# Altium PCB MOTOR_DRIVER.PcbDoc
Units mil, origin at the board's own origin, x right, y up, seen from the top; angles counter-clockwise.
Board outline 1860 x 1620 mil, 2 copper layers (Top Layer, Bottom Layer); 22 components, 16 nets, 59 pads, 0 vias.
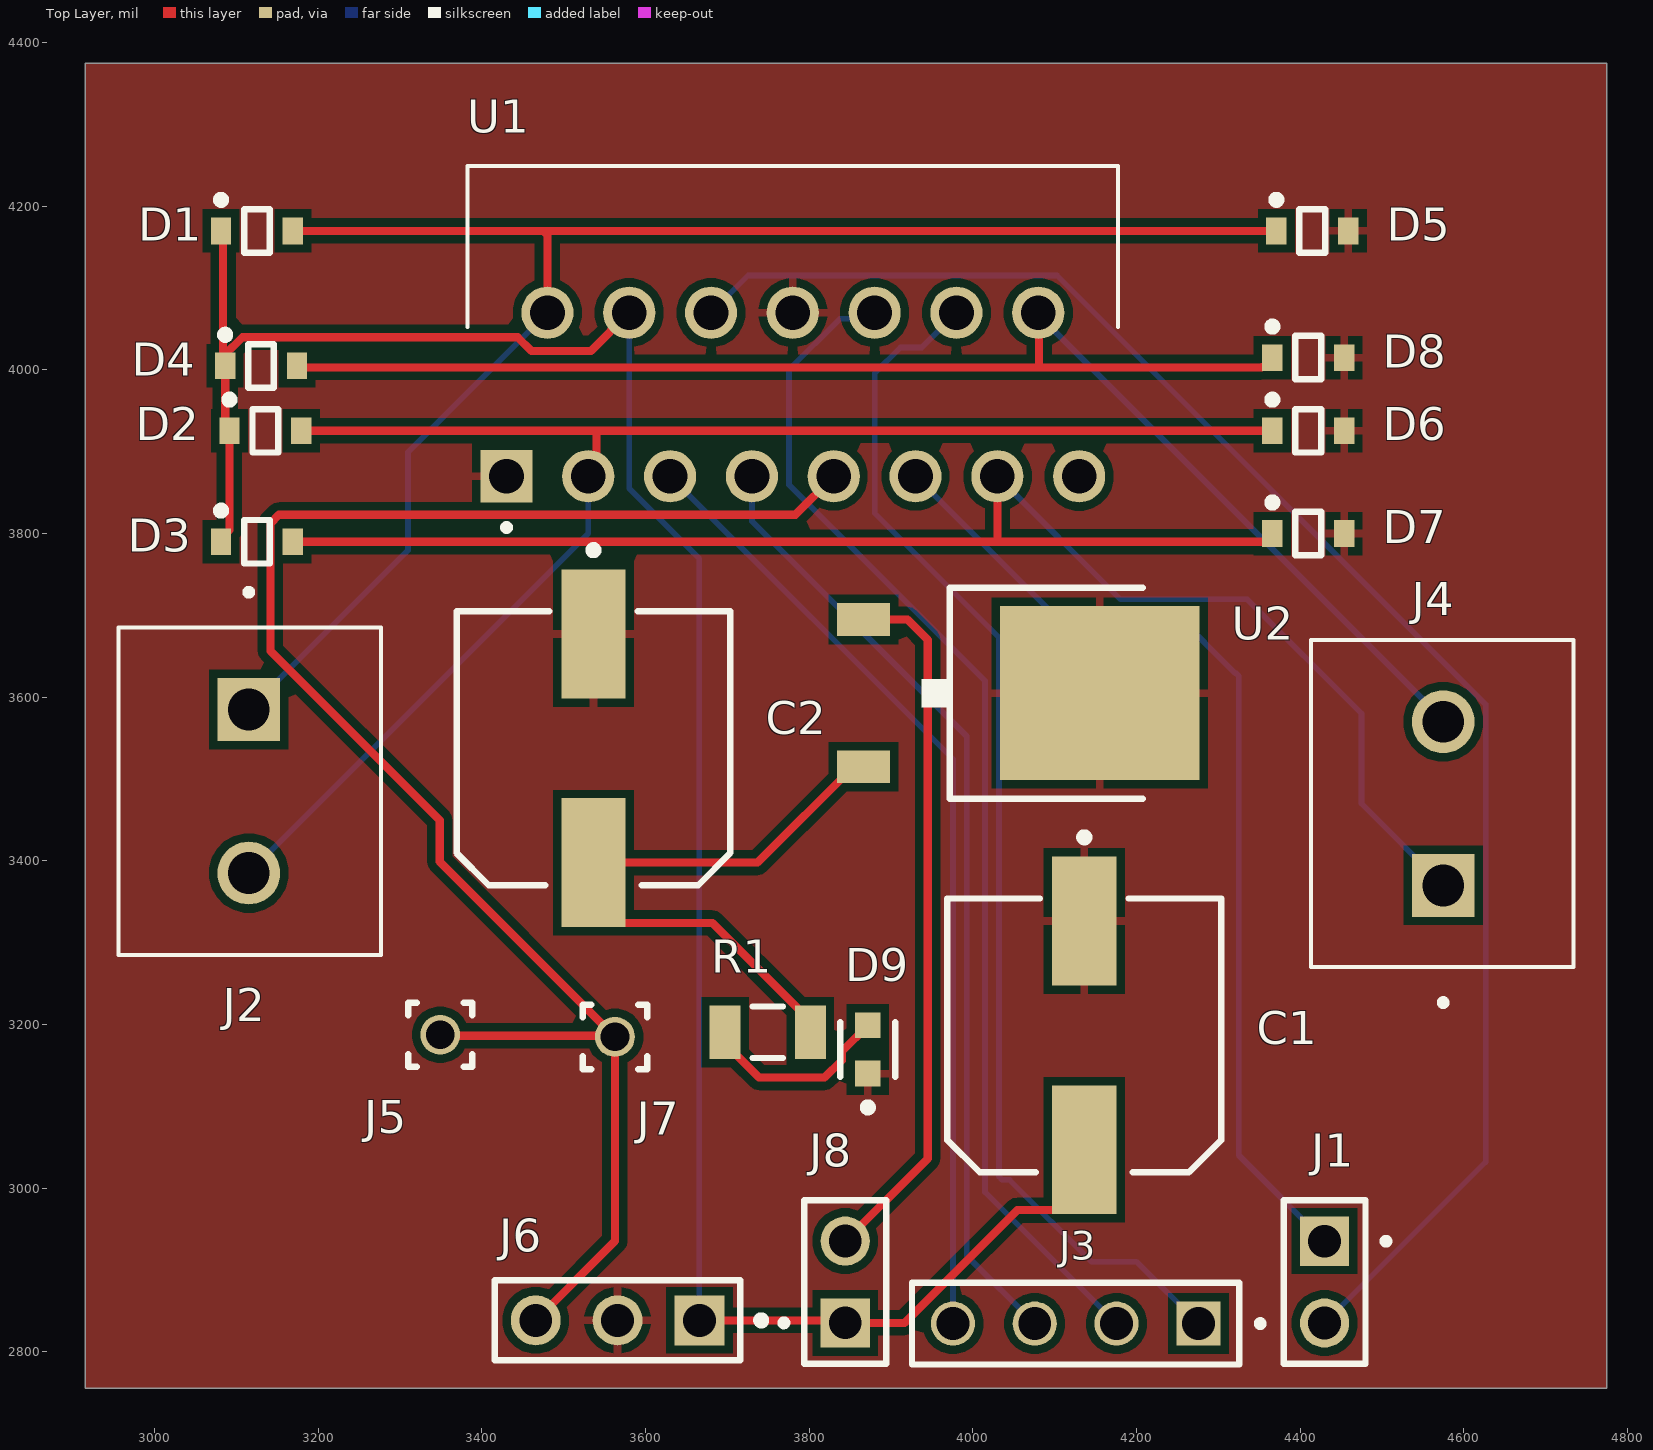
[diagram p0: Top Layer view]
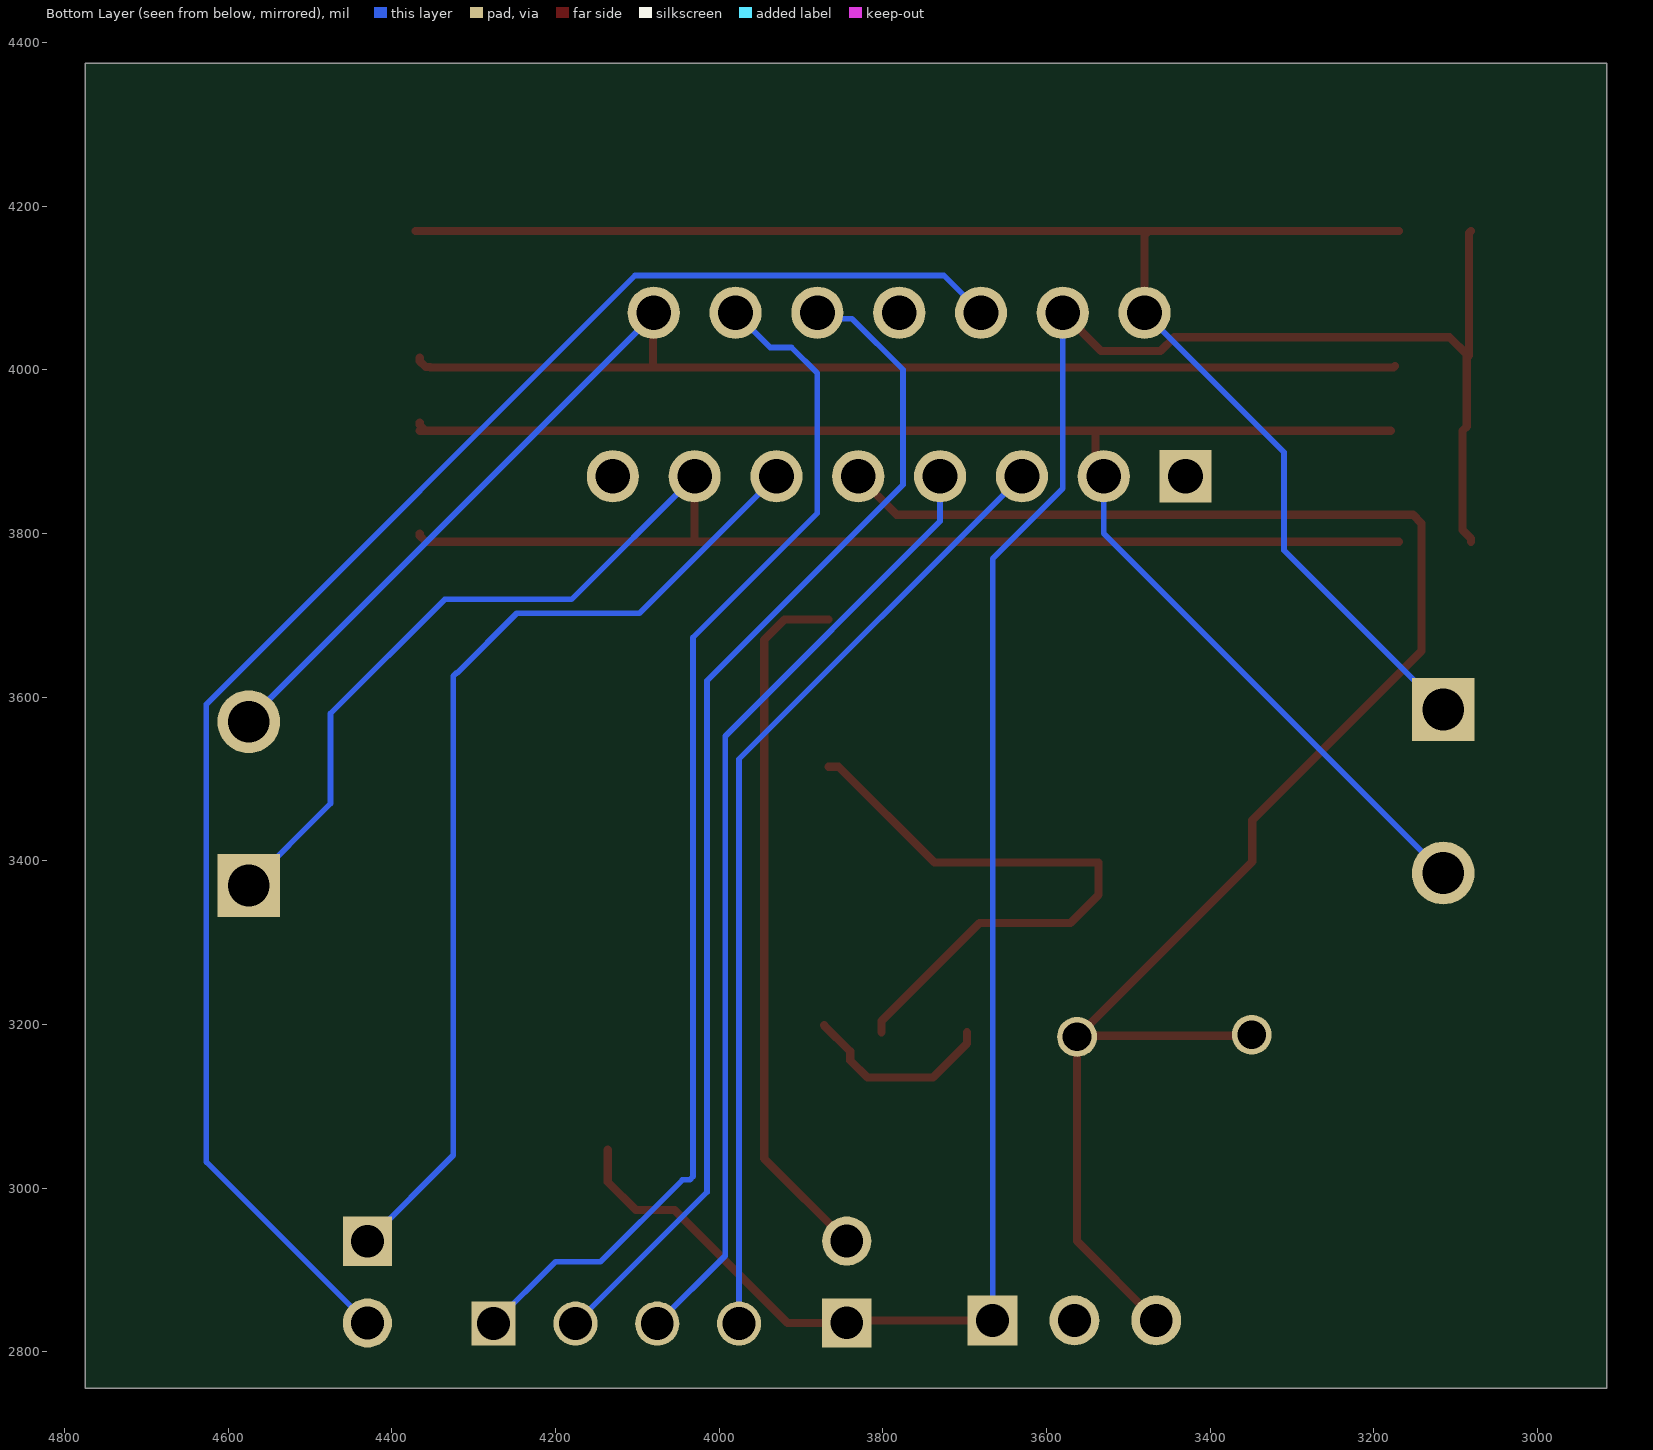
[diagram p1: Bottom Layer view, seen from below]

## Layer stack, top to bottom
Top Solder: solder mask 0.4, Solder Resist, Dk 3.5
Top Layer: signal copper 1.4
Dielectric 1: dielectric 12.6, FR-4, Dk 4.8
Bottom Layer: signal copper 1.4
Bottom Solder: solder mask 0.4, Solder Resist, Dk 3.5

## Board outline
2915,2755 4775,2755 4775,4375 2915,4375

## Design rules (kind name [scope] priority, off if disabled: settings)
Clearance [All] p1: gap=10 ignorepadtopadclearanceinfootprint=FALSE
PolygonConnect [All] p1: connectstyle=Relief reliefconductorwidth=10 reliefentries=4 polygonreliefangle="90 Angle" airgapwidth=10
RoutingVias [All] p1: holewidth=28 width=50 viastyle="Through Hole" minholewidth=28 minwidth=50 maxholewidth=28 maxwidth=50
SolderMaskExpansion [All] p1: expansion=4 istentingtop=FALSE
SupplyNets "Schematic Supply Nets_2" [InNet('VCC')] p1: voltage=0.000
SupplyNets "Schematic Supply Nets_1" [InNet('GND')] p2: voltage=0.000
SupplyNets "Schematic Supply Nets" [InNet('+5')] p3: voltage=0.000
Width [All] p1: maxlimit=10 minlimit=7 preferedwidth=10 toplayer_minwidth=10 bottomlayer_maxwidth=7 bottomlayer_prefwidth=7 minimp=50.000000 maximp=50.000000 favimp=50.000000
30 further rules are at their usual default settings.

## Components (designator, comment, footprint, x,y, rotation, side; value= is the part's Value field where it differs from the comment)
C1 "EEEFT1H221AP" FP-FTF-MFG 4136.27,3186.61 r270 top
C2 "EEEFT1H221AP" FP-FTF-MFG 3536.32,3537.56 r270 top
D1 "BAT54HT1G" ONSC-SOD-323-2-477-02_V 3125,4170 r0 top
D2 "BAT54HT1G" ONSC-SOD-323-2-477-02_V 3135.26,3925.67 r0 top
D3 "BAT54HT1G" ONSC-SOD-323-2-477-02_V 3125,3790 r0 top
D4 "BAT54HT1G" ONSC-SOD-323-2-477-02_V 3130,4005 r0 top
D5 "BAT54HT1G" ONSC-SOD-323-2-477-02_V 4415,4170 r0 top
D6 "BAT54HT1G" ONSC-SOD-323-2-477-02_V 4410,3925.67 r0 top
D7 "BAT54HT1G" ONSC-SOD-323-2-477-02_V 4410,3800 r0 top
D8 "BAT54HT1G" ONSC-SOD-323-2-477-02_V 4410,4015 r0 top
D9 "LTST-C190GKT" FP-LTST-C190GKT-MFG 3871.66,3169.41 r90 top
J1 "MTSW-101-X-X-D-X" SAMTEC_MTSW-101-X-X-D-X 4430,2885 r180 top
J2 "1729128" PHOENIX_1729128 2955.55,3685 r270 top
J3 "MTSW-104-07-T-S-207" SAMTEC_MTSW-104-07-T-S-207 4125.71,2834.28 r0 top
J4 "1729128" PHOENIX_1729128 4734.45,3270 r90 top
J5 "MTMM-101-X-X-S-X" SAMTEC_MTMM-101-X-X-S-X 3349.02,3187.39 r90 top
J6 "22-28-4033" MOLX-22-28-4033_V 3565.75,2838.28 r180 top
J7 "MTMM-101-X-X-S-X" SAMTEC_MTMM-101-X-X-S-X 3562.56,3184.79 r90 top
J8 "MTSW-101-X-X-D-X" SAMTEC_MTSW-101-X-X-D-X 3844.06,2885.21 r0 top
R1 "CRCW1206102KFKEA" FP-CRCW1206-e3-IPC_C 3749.3,3190.43 r0 top
U1 "L298N" TO127P2020X500X2100-15 3430,3870 r90 top
U2 "78M05" TO252 4056.58,3605 r270 top

## Footprints (in the part's own frame and the unit in brackets; to place one, negate y for a bottom-side part, rotate by r counter-clockwise, add the part's x,y. Pads: shape width x height; smd on the part's side, far side on the other; paste and mask are expansions set on the pad)
FP-CRCW1206-e3-IPC_C [mil]
  rect 37.64x65.28 smd paste+0 mask+0: 1(-52.21,0) 2(52.21,0)
  silkscreen extent -19,-31 19,31, body extent -75,-38 75,38, height 10
FP-FTF-MFG [mm]
  rect 4x2 smd paste+0 mask+0: 1(-3.55,0) 2(3.55,0)
  silkscreen extent -6.27,-4.25 4.25,4.25, body extent -5.8,-4.5 5.8,4.5, height 0.25
FP-LTST-C190GKT-MFG [mm]
  rect 0.8x0.8 smd paste+0 mask+0: 1(-0.75,0) 2(0.75,0)
  silkscreen extent -1.92,-0.85 0.85,0.85, body extent -1.25,-0.55 1.25,0.55, height 0.25
MOLX-22-28-4033_V [mm] "THD, 3-Leads, Body 7.62x2.49mm, Pitch 2.54mm"
  rect 1.55x1.55 hole 1.02: 1(-2.54,0)
  round 1.55 hole 1.02: 2(0,0) 3(2.54,0)
  silkscreen extent -4.59,-1.25 3.81,1.25, body extent -3.81,-1.24 3.81,1.24, height 8.38
ONSC-SOD-323-2-477-02_V [mm] "SOD, 2-Leads, Body 1.7x1.25mm"
  rect 0.63x0.83 smd: 1(-1.115,0) 2(1.115,0)
  silkscreen extent -1.24,-0.67 0.4,1.09, body extent -0.85,-0.63 0.85,0.63, height 1.06
PHOENIX_1729128 [mm]
  rect 1.95x1.95 / inner round 1.95 / far side rect 1.95x1.95 hole 1.3: 1(2.54,4.05)
  round 1.95 hole 1.3: 2(7.62,4.05)
  silkscreen extent -1.2,0 10.16,8.15
SAMTEC_MTMM-101-X-X-S-X [mm]
  round 1.24 hole 0.89: 01(0,0)
  silkscreen extent -1,-1 1,1
SAMTEC_MTSW-101-X-X-D-X [mil]
  rect 60x60 / inner round 60 / far side rect 60x60 hole 40: 01(0,-50)
  round 60 hole 40: 02(0,50)
  silkscreen extent -79,-100 50,100
SAMTEC_MTSW-104-07-T-S-207 [mm]
  rect 1.37x1.37 / inner round 1.37 / far side rect 1.37x1.37 hole 1.02: 01(3.81,0)
  round 1.37 hole 1.02: 02(1.27,0) 03(-1.27,0) 04(-3.81,0)
  silkscreen extent -5.08,-1.27 5.83,1.27
TO127P2020X500X2100-15 [mm]
  rect 1.62x1.62 hole 1.08: 1(0,0)
  round 1.62 hole 1.08: 2(5.08,-1.27) 3(0,-2.54) 4(5.08,-3.81) 5(0,-5.08) 6(5.08,-6.35) 7(0,-7.62) 8(5.08,-8.89) 9(0,-10.16) 10(5.08,-11.43) 11(0,-12.7) 12(5.08,-13.97) 13(0,-15.24) 14(5.08,-16.51) 15(0,-17.78)
  silkscreen extent -1.69,-18.99 9.63,1.21
TO252 [mil]
  rect 40x65 smd: 1(-90,-190) 2(90,-190)
  rect 212.6x244.09 smd: 3(0,98.42)
  silkscreen extent -129,-119 129,151

## Part data
C1 C2: library part CMP-05427-000092-1, "CAP ALUM 220UF 20% 50V SMD", Capacitance=220uF, Case/Package=Radial, Dielectric Material=Aluminium, ESR (Equivalent Series Resistance)=180mR, Leakage Current=110uA, Max Operating Temperature=105°C, Min Operating Temperature=-55°C, Package Quantity=500, Ripple Current=670mA, Tolerance=20%, Voltage=50V, Construction=Cylindrical, Contact Plating=Tin, Diameter=8mm, Height=10.2mm, Height - Seated (Max)=0.413inch, Lead Diameter=0.9mm, Lead Free="Lead Free", Lead Pitch=3.1mm, Length=10.2mm, Life (Hours)=2000Hour, Mount="Surface Mount", Number of Pins=2, Packaging="Tape and Reel", Radiation Hardening=No, REACH SVHC="No SVHC", Ripple Current (AC)=670mA, RoHS Compliant=Yes, Series=FT, Termination=SMD/SMT, Voltage Rating=50V, Voltage Rating (DC)=50V
D1 D2 D3 D4 D5 D6 D7 D8: library part CMP-1055-00462-1, "Schottky Barrier Diode, 2-Pin SOD-323, Pb-Free, Tape and Reel", Manufacturer="On Semiconductor", ComponentLink1Description="Manufacturer URL", ComponentLink1URL=http://www.onsemi.com/, ComponentLink2Description=Datasheet, ComponentLink2URL=http://www.onsemi.cn/pub_link/Collateral/BAT54HT1-D.PDF, ComponentLink3Description="Package Specification", ComponentLink3URL=http://www.onsemi.com/pub_link/Collateral/477-02.PDF.1, Configuration=Single, DatasheetVersion="Rev. 6", IFSM Max (A)=0.6, Mounting Technology="Surface Mount", PackageDescription="2-Pin SOD, Body 1.7 x 1.25 mm", PackageReference=SOD-323-2-477-02, PackageVersion="Rev. H, 03/2007", Packing="Tape and Reel", PartNumber=BAT54HT1G, RoHS=TRUE, trr Max (ns)=5
D9: library part CMP-22017-000005-2, "LED GREEN CLEAR CHIP SMD", Case Code (Imperial)=0603, Case Code (Metric)=1608, Color=Green, Forward Current=30mA, Forward Voltage=2.1V, Lens Color=Colorless, Max Operating Temperature=85°C, Min Operating Temperature=-55°C, Package Quantity=1, Power Dissipation=100mW, Reverse Voltage=5V, Test Current=10mA, Voltage=2V, Case/Package=0603, Depth=0.8mm, Dominant Wavelength=569nm, Height=0.8mm, Illumination Color=Green, Lead Free="Lead Free", Length=1.6mm, Lens Style=Clear, Lens Transparency=Clear, Luminous Intensity=6mcd, Mount="Surface Mount", Number of Elements=1, Number of LEDs=1, Number of Pins=2, Packaging="Tape and Reel", Power Rating=100mW, Radiation Hardening=No, Viewing Angle=130°, Wavelength=565nm, Width=0.8mm
J1 J8: "Variable Height PCB Header Strips, 0.100 pitch", Package=None, Check_prices=https://www.snapeda.com/parts/MTSW-101-09-L-D-210/Samtec/view-part/?ref=eda, MF=SAMTEC, MP=MTSW-101-09-L-D-210, SnapEDA_Link=https://www.snapeda.com/parts/MTSW-101-09-L-D-210/Samtec/view-part/?ref=snap
J2 J4: "PCB Terminal Screw 5.08mm 16AWG 400V 13.5A 2 Position COMBICON MKDSN Series", Package=None, Check_prices=https://www.snapeda.com/parts/1729128/Phoenix+Contact/view-part/?ref=eda, MF="Phoenix Contact", MP=1729128, SnapEDA_Link=https://www.snapeda.com/parts/1729128/Phoenix+Contact/view-part/?ref=snap
J3: Package=None, Availability=Unavailable, MP=MTSW-104-07-T-S-207, Price=None
J5 J7: "Connector Header Through Hole 1 position", Package=None, Check_prices=https://www.snapeda.com/parts/MTMM-101-05-G-S-225/Samtec/view-part/?ref=eda, MF=Samtec, MP=MTMM-101-05-G-S-225, SnapEDA_Link=https://www.snapeda.com/parts/MTMM-101-05-G-S-225/Samtec/view-part/?ref=snap
J6: library part CMP-1676-00001-5, "Male Header, Pitch 2.54 mm, 1 x 3 Position, Height 8.38 mm, Tail Length 3.18 mm, RoHS, Bulk", Colour=Black, Current Rating="4 A", Manufacturer=Molex, Max Operating Temperature="75 degC", Min Operating Temperature="0 degC", Package Quantity=1, Voltage Rating="250 V", ComponentLink1Description="Manufacturer URL", ComponentLink1URL=http://www.molex.com/, ComponentLink2Description=Datasheet, ComponentLink2URL=http://www.molex.com/pdm_docs/sd/022284033_sd.pdf, Contact Finish=Gold, Contact Material=Brass, Contact Plating=Gold, DatasheetVersion="Rev. G, 01/2012", Height="8.38 mm", Lead Pitch="0.1 inch", Length="7.62 mm", Mount="Through Hole", Mounting Technology="Through Hole", PackageDescription="Male Header, Pitch 2.54 mm, 1 x 3 Position, Height 8.38 mm, Tail Length 3.18 mm", PackageReference=22-28-4033, Packaging=Bulk, Pins=3, REACH SVHC=Unknown, RoHSCompliant=true, Rows=1
R1: library part CMP-2003-04803-2, "RES Thick Film, 102kΩ, 1%, 0.25W, 100ppm/°C, 1206", Case Code (Imperial)=1206, Case Code (Metric)=3216, Max Operating Temperature=155°C, Max Power Dissipation=250mW, Min Operating Temperature=-55°C, Package Quantity=10, Resistance=102kR, Temperature Coefficient=100ppm/°C, Tolerance=1%, Voltage Rating=200V, Case/Package=1206, Composition="Thick Film", Contact Plating=Tin, Depth=1.6mm, Features="Automotive AEC-Q200", Height=0.024inch, Lead Free="Lead Free", Length=3.2mm, Military Standard=Not, Number of Pins=2, Number of Terminations=2, Packaging="Tape and Reel", Power Rating=250mW, Radiation Hardening=No, Voltage Rating (DC)=200V, Weight=0.000353oz, Width=0.063inch
U1: "Dual Full Bridge Motor Driver 15-Pin(15+Tab) MULTIWATT V Tube", Package=None, Availability=Unavailable, MP=L298N, Price=None
U2: "Linear Voltage Regulator IC Positive Fixed 1 Output 1A TO-252 (DPAK)", Package=None, Check_prices=https://www.snapeda.com/parts/78M05/Umwelt+Sensor+Teknik/view-part/?ref=eda, MF=UMW, MP=78M05, SnapEDA_Link=https://www.snapeda.com/parts/78M05/Umwelt+Sensor+Teknik/view-part/?ref=snap

## Nets (pads, with @x,y where several pads share a name; then routed paths per layer and width w, separated by ;. In a path a pad name is that pad's centre, name@x,y a point inside that pad or via, vN(x,y) a via of type N, cw(c..) or ccw(c..) an arc to the next point about the centre after c; other vN are vias at no path point)
+5: J5.01 J6.3 J7.01 U1.9 | length 2115.7
  Top Layer w10: J5.01 3350.32,3186.09 3561.26,3186.09 J7.01 ; J6.3 3562.56,2935.09 J7.01 ; U1.9 3783.11,3823.11 3152.05,3823.11 3141.5,3812.55 3141.5,3656.49 3348.31,3449.67 3348.31,3399.03 J7.01
GND: C1.1 C2.1 D5.2 D6.2 D7.2 D8.2 D9.1 J6.2 U1.1 U1.8 U2.3
NetC2_2: C2.2 R1.2 U2.2 | length 761
  Top Layer w10: R1.2 3801.5,3204.25 3681.7,3324.05 3570.69,3324.05 3536.32,3358.43 C2.2 3736.87,3397.8 3854.07,3515 U2.2
NetD1_2: D1.2 D5.1 J2.1 U1.2 | length 1940.5
  Top Layer w10: D1.2 3475,4170 ; U1.2 3480,4165 3475,4170 ; D5.1 3475,4170
  Bottom Layer w7: J2.1 3309.51,3779.51 3309.51,3899.51 U1.2
NetD2_2: D2.2 D6.1 J2.2 U1.3 | length 1916.7
  Top Layer w10: D2.2 3540,3925.67 ; U1.3 3540,3880 3540,3925.67 ; D6.1 D6.1@4358.7,3925.67 ; D6.1@4366.1,3935.67 4366.1,3933.07 D6.1@4358.7,3925.67 ; 3540,3925.67 D6.1@4358.7,3925.67
  Bottom Layer w7: J2.2 3530,3800 U1.3
NetD3_2: D3.2 D7.1 J4.1 U1.13 | length 2099.4
  Top Layer w10: D3.2 4030,3790 ; U1.13 4030,3790 ; D7.1 4366.1,3797.4 4358.7,3790 4030,3790
  Bottom Layer w7: U1.13 4180.43,3719.57 4335.43,3719.57 4475,3580 4475,3470 J4.1
NetD4_2: D4.2 D8.1 J4.2 U1.14 | length 1972.6
  Top Layer w10: D4.2 3175.79,4003.11 4081.04,4003.11 ; U1.14 4081.04,4068.96 4081.04,4003.11 ; D8.1 4366.1,4011.06 4358.7,4003.66 4353.39,4003.66 4352.84,4003.11 4081.04,4003.11
  Bottom Layer w7: U1.14 4080,4067.5 4575,3572.5 J4.2
NetD9_2: D9.2 R1.1 | length 238.6
  Top Layer w10: R1.1 3697.09,3176.61 3738.7,3135 3818.75,3135 3839.83,3156.08 3839.83,3167.11 D9.2
NetJ1_01: J1.01 U1.11 | length 1230.5
  Bottom Layer w7: U1.11 4097.43,3702.57 4247.43,3702.57 4320,3630 4320.9,3630 4325,3625.9 4325,3040 J1.01
NetJ1_02: J1.02 U1.6 | length 2020.7
  Bottom Layer w7: U1.6 3725.39,4115.39 4102.99,4115.39 4626.89,3591.49 4626.89,3031.89 J1.02
NetJ3_01: J3.01 U1.12 | length 1493.6
  Bottom Layer w7: U1.12 3937.52,4027.52 3911.62,4027.52 3880,3995.9 3880,3825 4032,3673 4032,3014.1 4036.1,3010 4045,3010 4145,2910 4199.99,2910 J3.01
NetJ3_02: J3.02 U1.10 | length 1465.4
  Bottom Layer w7: U1.10 3872.61,4062.61 3837.61,4062.61 3775.39,4000.39 3775.39,3859.61 4015,3620 4015,2994.99 J3.02
NetJ3_03: J3.03 U1.7 | length 1178.9
  Bottom Layer w7: U1.7 3730,3815 3992.71,3552.29 3992.71,2917.28 J3.03
NetJ3_04: J3.04 U1.5 | length 1178.9
  Bottom Layer w7: U1.5 3975.71,3524.29 J3.04
NetJ8_02: J8.02 U2.1 | length 865.4
  Top Layer w10: J8.02 3945,3036.15 3945,3670 3920,3695 U2.1
VCC: C1.2 D1.1 D2.1 D3.1 D4.1 J6.1 J8.01 U1.4 | length 2771.2
  Top Layer w10: D3.1 3081.1,3793.94 3091.36,3804.19 D2.1 3086.1,3930.92 D4.1@3086.1,4015 ; D1.1 3083.6,4167.5 3083.6,4017.5 D4.1@3086.1,4015 ; U1.4 3533.11,4023.11 3460.58,4023.11 3443.69,4040 3107.16,4040 3086.1,4018.94 D4.1@3086.1,4015 ; J6.1 3840.99,2838.28 J8.01 3916.53,2835.21 4054.43,2973.11 4101.9,2973.11 4136.27,3007.48 C1.2
  Bottom Layer w7: U1.4 3580,3855 3665.75,3769.25 J6.1
pads on no net: U1.15

## Polygon pours and split planes (outlines as drawn)
GND on Top Layer "GND_L01_P000" (solid, pour order 0): 2915,4375 2915,2755 4775,2755 4775,4375